# EAGLE board d2pak_2h (EAGLE 5.06)
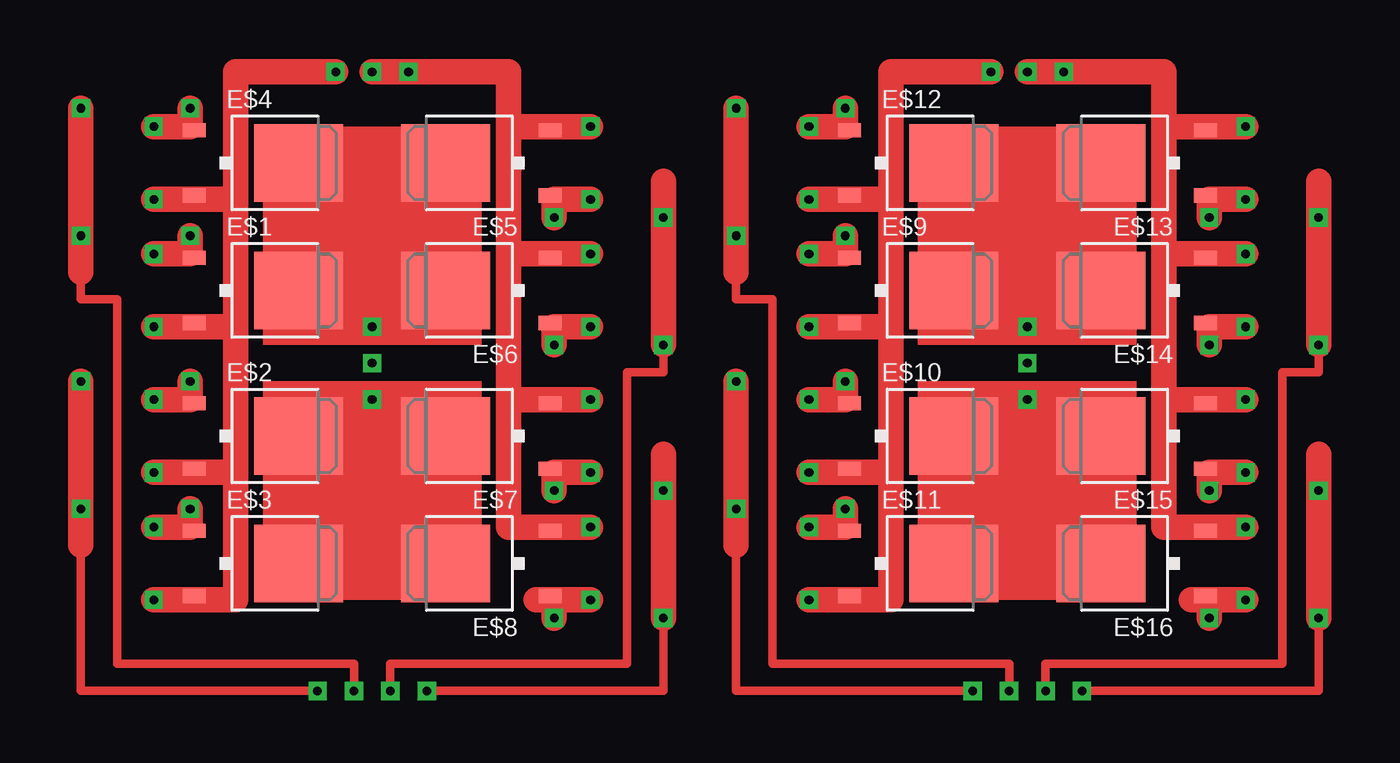
[diagram p0: board, top side]
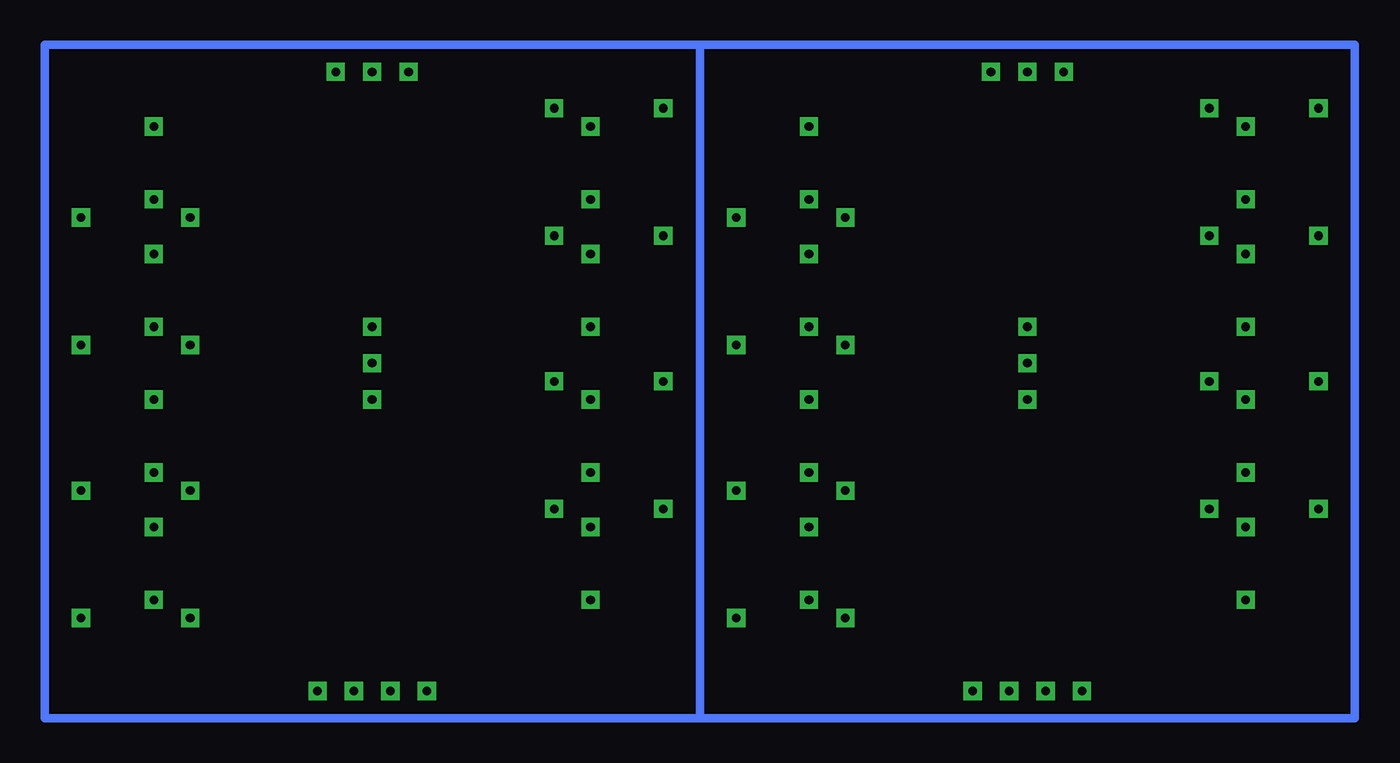
[diagram p1: board, bottom side, seen from below]

No outline drawn. Coordinates in mm, seen from the top.
Copper layers (1*16): Top 0.035mm / dielectric 1.5mm / Bottom 0.035mm
Design rules "default": minimum track width 10mil, minimum drill 24mil, track to track 8mil, track to pad 8mil, pad to pad 8mil, via to via 8mil, smd to smd 8mil, copper to edge 40mil, drill to drill 8mil, minimum pad ring 10mil, minimum via ring 8mil, stop-mask expansion 4mil, vias tented up to drill 0mil, thermal gap 10mil

## Footprints (pad centres in the part's own frame; a part is rotated, then mirrored left to right if it is on the bottom)
TO252 = smd 1 x 1.6: 1 -2.28,-4.8; 2 2.28,-4.8 | smd 5.4 x 6.2: 3 0,2.5

## Placement (x,y rotation side)
E$1  [TO252]  15.24,29.84 270 top
E$2  [TO252]  15.24,19.68 270 top
E$3  [TO252]  15.24,10.79 270 top
E$4  [TO252]  15.24,38.73 270 top
E$5  [TO252]  30.48,38.73 90 top
E$6  [TO252]  30.48,29.84 90 top
E$7  [TO252]  30.48,19.68 90 top
E$8  [TO252]  30.48,10.79 90 top
E$9  [TO252]  60.96,29.84 270 top
E$10  [TO252]  60.96,19.68 270 top
E$11  [TO252]  60.96,10.79 270 top
E$12  [TO252]  60.96,38.73 270 top
E$13  [TO252]  76.2,38.73 90 top
E$14  [TO252]  76.2,29.84 90 top
E$15  [TO252]  76.2,19.68 90 top
E$16  [TO252]  76.2,10.79 90 top

## Library data of the parts
E$1-E$16 = linear

## Tracks (layer width: path | path; a pad name or v marks a point on that pad's centre or on a via)
S$1
  Top 2.54: 29.21,10.79 27.94,10.79 27.94,20.95
S$2
  Top 1.778: 17.78,29.84 26.67,29.84
  Top 2.54: 17.78,28.57 17.78,29.84 17.78,38.73 27.94,38.73 27.94,28.57
S$3  (via drill 0.6 pad 1.27)
  Top 0.61: 2.54,31.11 2.54,29.21 5.08,29.21 5.08,3.81 21.59,3.81 v21.59,1.91
  Top 0.813: v2.54,42.55 v2.54,33.66
  Top 1.778: 2.54,31.11 v2.54,33.66 v2.54,42.55
S$4  (via drill 0.6 pad 1.27)
  Top 0.61: 2.54,12.06 2.54,1.91 v19.05,1.91
  Top 0.813: v2.54,23.5 v2.54,14.61
  Top 1.778: 2.54,12.06 v2.54,14.61 v2.54,23.5
S$5
  Bottom 0.61: 45.72,0 0,0 0,46.99 45.72,46.99 45.72,0
S$6  (via drill 0.6 pad 1.27)
  Top 1.778: v10.16,42.55 10.16,41.27 v7.62,41.27
S$7  (via drill 0.6 pad 1.27)
  Top 1.778: v10.16,33.66 10.16,32.38 v7.62,32.38
S$8  (via drill 0.6 pad 1.27)
  Top 1.778: v10.16,23.5 10.16,22.23 v7.62,22.23
S$9  (via drill 0.6 pad 1.27)
  Top 0.61: v43.18,6.99 43.18,1.91 v26.67,1.91
  Top 0.813: v43.18,6.99 v43.18,15.88 43.18,18.41
  Top 1.778: v43.18,6.99 43.18,18.41
S$10  (via drill 0.6 pad 1.27)
  Top 0.61: v43.18,26.04 43.18,24.13 40.64,24.13 40.64,3.81 24.13,3.81 v24.13,1.91
  Top 0.813: v43.18,26.04 v43.18,34.92
  Top 1.778: v43.18,26.04 v43.18,34.92 43.18,37.47
S$11  (via drill 0.6 pad 1.27)
  Top 1.778: v10.16,14.61 10.16,13.34 v7.62,13.34
S$12  (via drill 0.6 pad 1.27)
  Top 1.778: v38.1,17.14 35.56,17.14 v35.56,15.88
S$13  (via drill 0.6 pad 1.27)
  Top 1.778: v38.1,27.3 35.56,27.3 v35.56,26.04
S$14  (via drill 0.6 pad 1.27)
  Top 1.778: v38.1,36.2 35.56,36.2 v35.56,34.92
S$15  (via drill 0.6 pad 1.27)
  Top 0.61: 48.26,31.11 48.26,29.21 50.8,29.21 50.8,3.81 67.31,3.81 v67.31,1.91
  Top 0.813: v48.26,42.55 v48.26,33.66
  Top 1.778: 48.26,31.11 v48.26,33.66 v48.26,42.55
S$16  (via drill 0.6 pad 1.27)
  Top 0.61: 48.26,12.06 48.26,1.91 v64.77,1.91
  Top 0.813: v48.26,23.5 v48.26,14.61
  Top 1.778: 48.26,12.06 v48.26,14.61 v48.26,23.5
S$17  (via drill 0.6 pad 1.27)
  Top 0.61: v88.9,6.99 88.9,1.91 v72.39,1.91
  Top 0.813: v88.9,6.99 v88.9,15.88 88.9,18.41
  Top 1.778: v88.9,6.99 88.9,18.41
S$18  (via drill 0.6 pad 1.27)
  Top 0.61: v88.9,26.04 88.9,24.13 86.36,24.13 86.36,3.81 69.85,3.81 v69.85,1.91
  Top 0.813: v88.9,26.04 v88.9,34.92
  Top 1.778: v88.9,26.04 v88.9,34.92 88.9,37.47
S$19
  Top 2.54: 74.93,10.79 73.66,10.79 73.66,20.95
S$20
  Top 2.54: 63.5,10.79 63.5,19.68
S$21
  Top 1.778: 63.5,29.84 72.39,29.84
  Top 2.54: 63.5,28.57 63.5,29.84 63.5,38.73 73.66,38.73 73.66,28.57
S$22
  Top 2.54: 17.78,10.79 17.78,19.68
S$23  (via drill 0.6 pad 1.27)
  Top 1.778: v83.82,8.26 81.28,8.26 | v81.28,6.99 81.28,8.26 | 81.28,8.26 80.01,8.26
S$24  (via drill 0.6 pad 1.27)
  other vias: 68.58,24.77
S$25  (via drill 0.6 pad 1.27)
  Top 1.778: v20.32,45.09 13.34,45.09 13.34,36.2 | 11.43,36.2 10.16,36.2 | 11.43,36.2 v7.62,36.2 | 13.34,36.2 11.43,36.2 | 13.34,27.3 13.34,36.2 | 13.34,27.3 10.16,27.3 | 13.34,27.3 v7.62,27.3 | 13.34,17.14 13.34,27.3 | 13.34,17.14 10.16,17.14 | 13.34,17.14 v7.62,17.14 | 13.34,8.26 13.34,17.14 | 13.34,8.26 10.16,8.26 | v7.62,8.26 13.34,8.26
S$26  (via drill 0.6 pad 1.27)
  other vias: 68.58,27.3
S$27  (via drill 0.6 pad 1.27)
  other vias: 68.58,22.23
S$28  (via drill 0.6 pad 1.27)
  Top 1.778: v55.88,42.55 55.88,41.27 v53.34,41.27
S$29  (via drill 0.6 pad 1.27)
  Top 1.778: v55.88,33.66 55.88,32.38 v53.34,32.38
S$30  (via drill 0.6 pad 1.27)
  Top 1.778: v55.88,23.5 55.88,22.23 v53.34,22.23
S$31  (via drill 0.6 pad 1.27)
  Top 1.778: v66.04,45.09 59.05,45.09 59.05,36.2 | 57.15,36.2 55.88,36.2 | 57.15,36.2 v53.34,36.2 | 59.05,36.2 57.15,36.2 | 59.05,27.3 59.05,36.2 | 59.05,27.3 55.88,27.3 | 59.05,27.3 v53.34,27.3 | 59.05,17.14 59.05,27.3 | 59.05,17.14 55.88,17.14 | 59.05,17.14 v53.34,17.14 | 59.05,8.26 59.05,17.14 | 59.05,8.26 55.88,8.26 | v53.34,8.26 59.05,8.26
S$32  (via drill 0.6 pad 1.27)
  Top 1.778: v22.86,45.09 v25.4,45.09 32.38,45.09 32.38,41.27 | 32.38,41.27 35.56,41.27 | 32.38,41.27 v38.1,41.27 | 34.29,22.23 35.56,22.23 | 34.29,22.23 v38.1,22.23 | 32.38,32.38 32.38,41.27 | 32.38,32.38 35.56,32.38 | 32.38,32.38 v38.1,32.38 | 32.38,22.23 32.38,32.38 | 32.38,22.23 34.29,22.23 | 32.38,13.34 32.38,22.23 | 32.38,13.34 35.56,13.34 | 32.38,13.34 v38.1,13.34
S$33  (via drill 0.6 pad 1.27)
  Top 1.778: v38.1,8.26 35.56,8.26 | v35.56,6.99 35.56,8.26 | 35.56,8.26 34.29,8.26
S$34  (via drill 0.6 pad 1.27)
  other vias: 22.86,24.77
S$35  (via drill 0.6 pad 1.27)
  other vias: 22.86,27.3
S$36  (via drill 0.6 pad 1.27)
  other vias: 22.86,22.23
S$37  (via drill 0.6 pad 1.27)
  Top 1.778: v55.88,14.61 55.88,13.34 v53.34,13.34
S$38  (via drill 0.6 pad 1.27)
  Top 1.778: v83.82,17.14 81.28,17.14 v81.28,15.88
S$39  (via drill 0.6 pad 1.27)
  Top 1.778: v83.82,27.3 81.28,27.3 v81.28,26.04
S$40  (via drill 0.6 pad 1.27)
  Top 1.778: v68.58,45.09 v71.12,45.09 78.11,45.09 78.11,41.27 | 78.11,41.27 81.28,41.27 | 78.11,41.27 v83.82,41.27 | 80.01,22.23 81.28,22.23 | 80.01,22.23 v83.82,22.23 | 78.11,32.38 78.11,41.27 | 78.11,32.38 81.28,32.38 | 78.11,32.38 v83.82,32.38 | 78.11,22.23 78.11,32.38 | 78.11,22.23 80.01,22.23 | 78.11,13.34 78.11,22.23 | 78.11,13.34 81.28,13.34 | 78.11,13.34 v83.82,13.34
S$41  (via drill 0.6 pad 1.27)
  Top 1.778: v83.82,36.2 81.28,36.2 v81.28,34.92
S$42
  Bottom 0.61: 91.44,0 45.72,0 45.72,46.99 91.44,46.99 91.44,0
(copper drawn outside any net)
  shapes: Top area x8